# Altium PCB LS1C300B_176A_Msystem.PcbDoc (part 3 of 3)
Units mm, origin at the board's own origin, x right, y up, seen from the top; angles counter-clockwise.
Board outline 100.25 x 70.25 mm, 2 copper layers (Top Layer, Bottom Layer); 139 components, 183 nets, 683 pads, 164 vias.
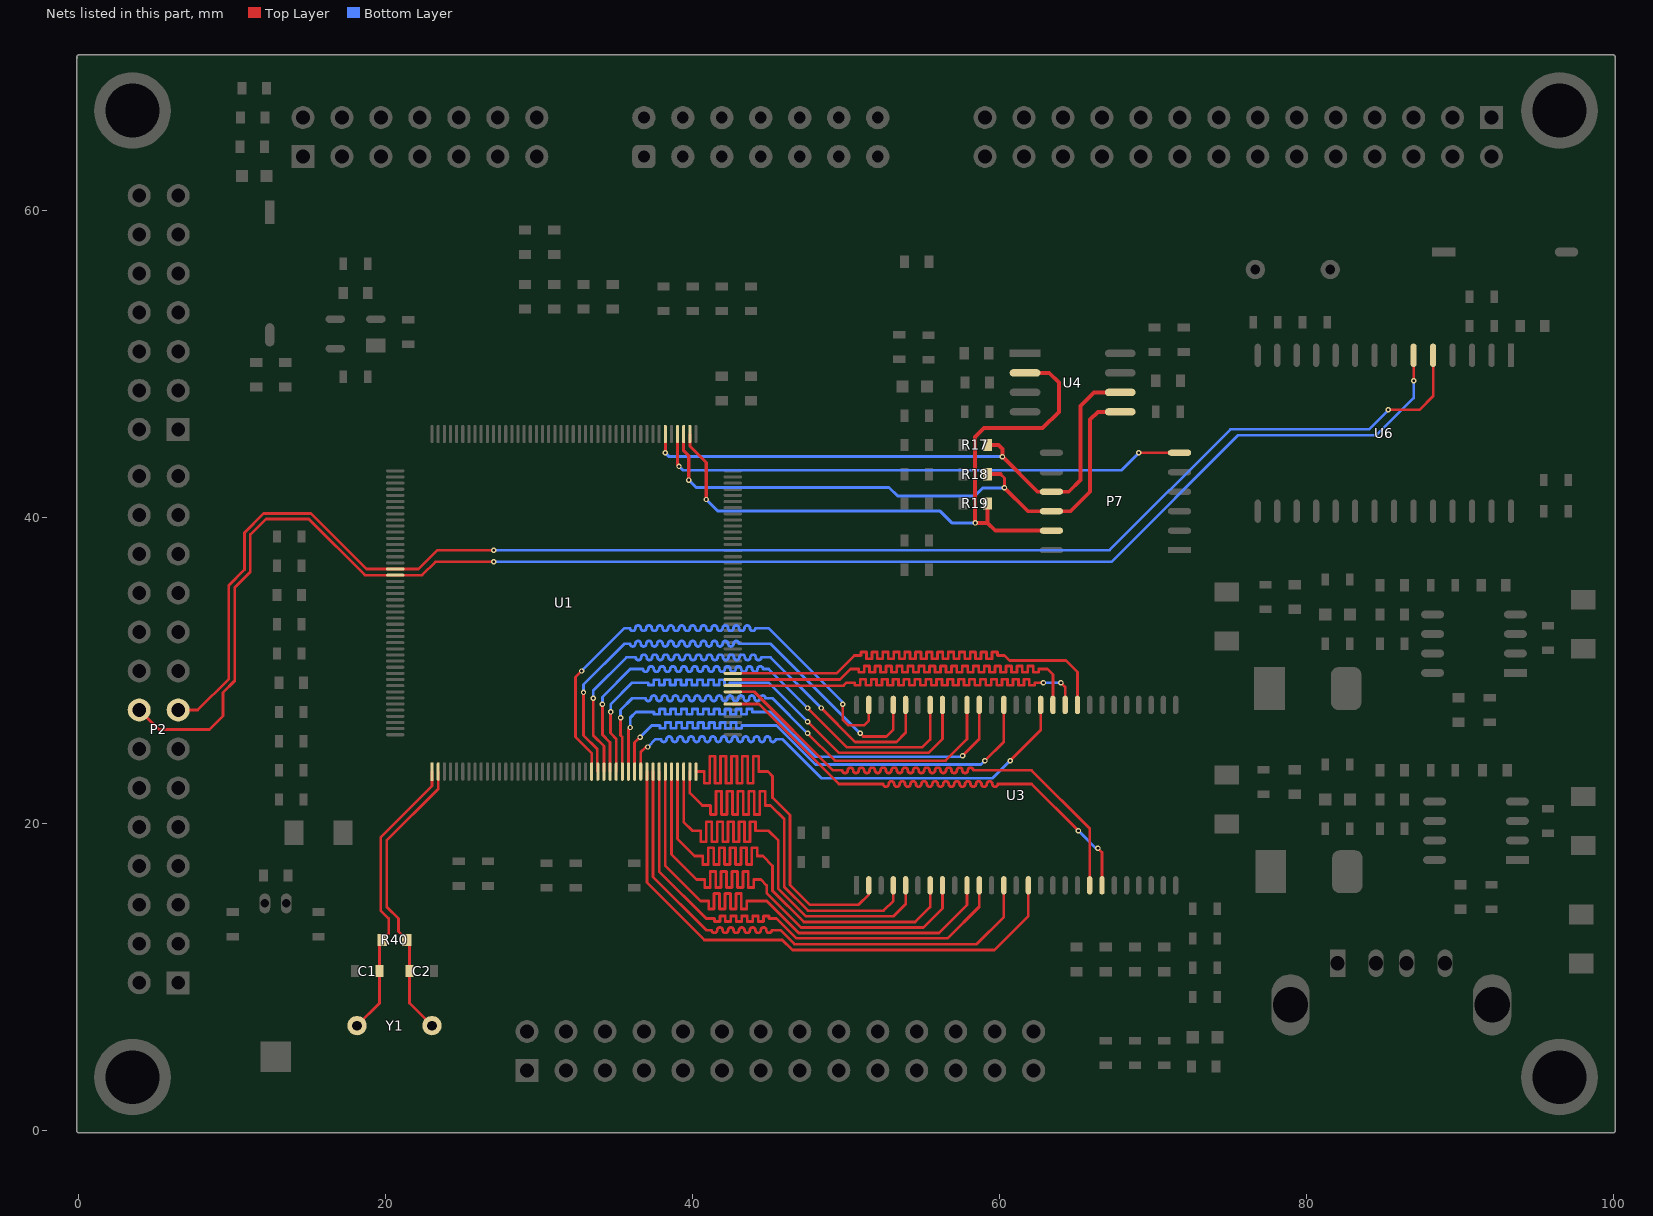
[diagram p3: the nets of this part, all layers, seen from the top]

## Via types
v1: diameter 0.356, hole 0.178, Top Layer to Bottom Layer, 153 vias
v2: diameter 0.508, hole 0.254, Top Layer to Bottom Layer, 4 vias
v3: diameter 1.5, hole 0.75, Top Layer to Bottom Layer, 3 vias
v4: diameter 0.762, hole 0.381, Top Layer to Bottom Layer, 2 vias
v5: diameter 0.6, hole 0.3, Top Layer to Bottom Layer, 1 vias
v6: diameter 0.8, hole 0.4, Top Layer to Bottom Layer, 1 vias

## Nets (pads, with @x,y where several pads share a name; then routed paths per layer and width w, separated by ;. In a path a pad name is that pad's centre, name@x,y a point inside that pad or via, vN(x,y) a via of type N, cw(c..) or ccw(c..) an arc to the next point about the centre after c; other vN are vias at no path point) (continued)
SDRAM_A12: U1.55 U3.36 | length 36.8
  Top Layer w0.178: U1.55@42.623,29.817 49.375,29.817 50.546,30.988 50.8,30.988 50.978,30.988 50.978,31.214 51.333,31.214 51.333,30.988 51.333,30.762 51.689,30.762 51.689,30.988 51.689,31.214 52.045,31.214 52.045,30.988 52.045,30.762 52.4,30.762 52.4,30.988 52.4,31.214 52.756,31.214 52.756,30.988 52.756,30.762 53.111,30.762 53.111,30.988 53.111,31.214 53.467,31.214 53.467,30.988 53.467,30.762 53.823,30.762 53.823,30.988 53.823,31.214 54.178,31.214 54.178,30.988 54.178,30.762 54.534,30.762 54.534,30.988 54.534,31.214 54.889,31.214 54.889,30.988 54.889,30.762 55.245,30.762 55.245,30.988 55.245,31.214 55.601,31.214 55.601,30.988 55.601,30.762 55.956,30.762 55.956,30.988 55.956,31.214 56.312,31.214 56.312,30.988 56.312,30.762 56.667,30.762 56.667,30.988 56.667,31.214 57.023,31.214 57.023,30.988 57.023,30.762 57.379,30.762 57.379,30.988 57.379,31.214 57.734,31.214 57.734,30.988 57.734,30.762 58.09,30.762 58.09,30.988 58.09,31.214 58.445,31.214 58.445,30.988 58.445,30.762 58.801,30.762 58.801,30.988 58.801,31.214 59.157,31.214 59.157,30.988 59.157,30.762 59.512,30.762 59.512,30.988 59.512,31.214 59.868,31.214 59.868,30.988 60.325,30.988 60.655,30.658 64.338,30.658 65.086,29.91 U3.36@65.086,27.762
SDRAM_BA0: U1.52 U3.20 | length 35.5
  Top Layer w0.178: U1.52@42.623,28.617 44.022,28.617 49.144,23.495 49.403,23.495 49.759,23.495 ccw(c49.936,23.495) 50.114,23.495 cw(c50.292,23.495) 50.47,23.495 ccw(c50.648,23.495) 50.825,23.495 cw(c51.003,23.495) 51.181,23.495 ccw(c51.359,23.495) 51.537,23.495 cw(c51.714,23.495) 51.892,23.495 ccw(c52.07,23.495) 52.248,23.495 cw(c52.426,23.495) 52.603,23.495 ccw(c52.781,23.495) 52.959,23.495 cw(c53.137,23.495) 53.315,23.495 ccw(c53.492,23.495) 53.67,23.495 cw(c53.848,23.495) 54.026,23.495 ccw(c54.204,23.495) 54.381,23.495 cw(c54.559,23.495) 54.737,23.495 ccw(c54.915,23.495) 55.093,23.495 cw(c55.27,23.495) 55.448,23.495 ccw(c55.626,23.495) 55.804,23.495 cw(c55.982,23.495) 56.159,23.495 ccw(c56.337,23.495) 56.515,23.495 cw(c56.693,23.495) 56.871,23.495 ccw(c57.048,23.495) 57.226,23.495 cw(c57.404,23.495) 57.582,23.495 ccw(c57.76,23.495) 57.937,23.495 cw(c58.115,23.495) 58.293,23.495 58.42,23.495 62.103,23.495 65.886,19.712 U3.20@65.886,16.002
SDRAM_BA1: U1.50 U3.21 | length 34.5
  Top Layer w0.178: U1.50@42.623,27.817 44.319,27.817 49.53,22.606 52.07,22.606 52.426,22.606 ccw(c52.603,22.606) 52.781,22.606 cw(c52.959,22.606) 53.137,22.606 ccw(c53.315,22.606) 53.492,22.606 cw(c53.67,22.606) 53.848,22.606 ccw(c54.026,22.606) 54.204,22.606 cw(c54.381,22.606) 54.559,22.606 ccw(c54.737,22.606) 54.915,22.606 cw(c55.093,22.606) 55.27,22.606 ccw(c55.448,22.606) 55.626,22.606 cw(c55.804,22.606) 55.982,22.606 ccw(c56.159,22.606) 56.337,22.606 cw(c56.515,22.606) 56.693,22.606 ccw(c56.871,22.606) 57.048,22.606 cw(c57.226,22.606) 57.404,22.606 ccw(c57.582,22.606) 57.76,22.606 cw(c57.937,22.606) 58.115,22.606 ccw(c58.293,22.606) 58.471,22.606 cw(c58.649,22.606) 58.826,22.606 ccw(c59.004,22.606) 59.182,22.606 cw(c59.36,22.606) 59.538,22.606 ccw(c59.715,22.606) 59.893,22.606 60.249,22.606 60.325,22.606 62.103,22.606 v1(65.151,19.558) ; v1(66.421,18.415) 66.686,18.15 U3.21@66.686,16.002
  Bottom Layer w0.178: v1(65.151,19.558) 66.294,18.415 v1(66.421,18.415)
SDRAM_CKE: U1.53 U3.37 | length 36
  Top Layer w0.178: U1.53@42.623,29.017 49.845,29.017 50.038,29.21 50.216,29.21 50.571,29.21 50.571,29.045 50.927,29.045 50.927,29.21 50.927,29.439 51.283,29.439 51.283,29.21 51.283,29.045 51.638,29.045 51.638,29.21 51.638,29.439 51.994,29.439 51.994,29.21 51.994,29.045 52.349,29.045 52.349,29.21 52.349,29.439 52.705,29.439 52.705,29.21 52.705,29.045 53.061,29.045 53.061,29.21 53.061,29.439 53.416,29.439 53.416,29.21 53.416,29.045 53.772,29.045 53.772,29.21 53.772,29.439 54.127,29.439 54.127,29.21 54.127,29.045 54.483,29.045 54.483,29.21 54.483,29.439 54.839,29.439 54.839,29.21 54.839,29.045 55.194,29.045 55.194,29.21 55.194,29.439 55.55,29.439 55.55,29.21 55.55,29.045 55.905,29.045 55.905,29.21 55.905,29.439 56.261,29.439 56.261,29.21 56.261,29.045 56.617,29.045 56.617,29.21 56.617,29.439 56.972,29.439 56.972,29.21 56.972,29.045 57.328,29.045 57.328,29.21 57.328,29.439 57.683,29.439 57.683,29.21 57.683,29.045 58.039,29.045 58.039,29.21 58.039,29.439 58.395,29.439 58.395,29.21 58.395,29.045 58.75,29.045 58.75,29.21 58.75,29.439 59.106,29.439 59.106,29.21 59.106,29.045 59.461,29.045 59.461,29.21 59.461,29.439 59.817,29.439 59.817,29.21 59.817,29.045 60.173,29.045 60.173,29.21 60.173,29.439 60.528,29.439 60.528,29.21 60.528,29.045 60.884,29.045 60.884,29.21 60.884,29.439 61.239,29.439 61.239,29.21 61.239,29.045 61.595,29.045 61.595,29.21 61.595,29.439 61.951,29.439 61.951,29.21 61.951,29.045 62.306,29.045 62.306,29.21 62.611,29.21 v1(62.865,29.21) ; v1(64.008,29.21) 64.286,28.932 U3.37@64.286,27.762
  Bottom Layer w0.178: v1(62.865,29.21) v1(64.008,29.21)
SDRAM_CLK: U1.54 U3.38 | length 36.7
  Top Layer w0.178: U1.54@42.623,29.417 49.61,29.417 50.292,30.099 50.47,30.099 50.825,30.099 50.825,29.896 51.181,29.896 51.181,30.099 51.181,30.302 51.537,30.302 51.537,30.099 51.537,29.896 51.892,29.896 51.892,30.099 51.892,30.302 52.248,30.302 52.248,30.099 52.248,29.896 52.603,29.896 52.603,30.099 52.603,30.302 52.959,30.302 52.959,30.099 52.959,29.896 53.315,29.896 53.315,30.099 53.315,30.302 53.67,30.302 53.67,30.099 53.67,29.896 54.026,29.896 54.026,30.099 54.026,30.302 54.381,30.302 54.381,30.099 54.381,29.896 54.737,29.896 54.737,30.099 54.737,30.302 55.093,30.302 55.093,30.099 55.093,29.896 55.448,29.896 55.448,30.099 55.448,30.302 55.804,30.302 55.804,30.099 55.804,29.896 56.159,29.896 56.159,30.099 56.159,30.302 56.515,30.302 56.515,30.099 56.515,29.896 56.871,29.896 56.871,30.099 56.871,30.302 57.226,30.302 57.226,30.099 57.226,29.896 57.582,29.896 57.582,30.099 57.582,30.302 57.937,30.302 57.937,30.099 57.937,29.896 58.293,29.896 58.293,30.099 58.293,30.302 58.649,30.302 58.649,30.099 58.649,29.896 59.004,29.896 59.004,30.099 59.004,30.302 59.36,30.302 59.36,30.099 59.36,29.896 59.715,29.896 59.715,30.099 59.715,30.302 60.071,30.302 60.071,30.099 60.071,29.896 60.427,29.896 60.427,30.099 60.427,30.302 60.782,30.302 60.782,30.099 60.782,29.896 61.138,29.896 61.138,30.099 61.138,30.302 61.493,30.302 61.493,30.099 61.493,29.896 61.849,29.896 61.849,30.099 61.849,30.302 62.205,30.302 62.205,30.099 62.205,29.896 62.56,29.896 62.56,30.099 62.738,30.099 63.119,30.099 63.486,29.732 U3.38@63.486,27.762
SDRAM_D0: U1.44 U3.2 | length 36.8
  Top Layer w0.178: U1.44@40.223,23.417 40.401,23.417 40.756,23.417 40.756,22.658 41.112,22.658 41.112,23.417 41.112,24.42 41.468,24.42 41.468,23.417 41.468,22.658 41.823,22.658 41.823,23.417 41.823,24.42 42.179,24.42 42.179,23.417 42.179,22.658 42.534,22.658 42.534,23.417 42.534,24.42 42.89,24.42 42.89,23.417 42.89,22.658 43.246,22.658 43.246,23.417 43.246,24.42 43.601,24.42 43.601,23.417 43.601,22.658 43.957,22.658 43.957,23.417 43.957,24.42 44.312,24.42 44.312,23.417 44.668,23.417 44.909,23.417 45.212,23.114 45.212,21.717 46.355,20.574 46.355,16.017 47.64,14.732 50.8,14.732 51.486,15.418 U3.2@51.486,16.002
SDRAM_D1: U1.43 U3.4 | length 36.8
  Top Layer w0.178: U1.43@39.823,23.417 39.823,22.026 40.64,21.209 40.818,21.209 41.173,21.209 41.173,20.614 41.529,20.614 41.529,21.209 41.529,22.127 41.885,22.127 41.885,21.209 41.885,20.614 42.24,20.614 42.24,21.209 42.24,22.127 42.596,22.127 42.596,21.209 42.596,20.614 42.951,20.614 42.951,21.209 42.951,22.127 43.307,22.127 43.307,21.209 43.307,20.614 43.663,20.614 43.663,21.209 43.663,22.127 44.018,22.127 44.018,21.209 44.018,20.614 44.374,20.614 44.374,21.209 44.374,22.127 44.729,22.127 44.729,21.209 45.085,21.209 45.974,20.32 45.974,15.895 47.518,14.351 52.451,14.351 53.086,14.986 U3.4@53.086,16.002
SDRAM_D2: U1.42 U3.5 | length 36.8
  Top Layer w0.178: U1.42@39.423,23.417 39.423,20.14 40.005,19.558 40.183,19.558 40.538,19.558 40.538,18.837 40.894,18.837 40.894,19.558 40.894,20.152 41.25,20.152 41.25,19.558 41.25,18.837 41.605,18.837 41.605,19.558 41.605,20.152 41.961,20.152 41.961,19.558 41.961,18.837 42.316,18.837 42.316,19.558 42.316,20.152 42.672,20.152 42.672,19.558 42.672,18.837 43.028,18.837 43.028,19.558 43.028,20.152 43.383,20.152 43.383,19.558 43.383,18.837 43.739,18.837 43.739,19.558 43.739,20.152 44.094,20.152 44.094,19.558 44.577,19.558 44.958,19.558 45.593,18.923 45.593,15.773 47.371,13.995 53.111,13.995 53.886,14.77 U3.5@53.886,16.002
SDRAM_D3: U1.41 U3.7 | length 36.8
  Top Layer w0.178: U1.41@39.023,23.417 39.023,19.016 40.132,17.907 40.31,17.907 40.665,17.907 40.665,17.361 41.021,17.361 41.021,17.907 41.021,18.453 41.377,18.453 41.377,17.907 41.377,17.361 41.732,17.361 41.732,17.907 41.732,18.453 42.088,18.453 42.088,17.907 42.088,17.361 42.443,17.361 42.443,17.907 42.443,18.453 42.799,18.453 42.799,17.907 42.799,17.361 43.155,17.361 43.155,17.907 43.155,18.453 43.51,18.453 43.51,17.907 43.51,17.361 43.866,17.361 43.866,17.907 43.866,18.453 44.221,18.453 44.221,17.907 44.45,17.907 44.577,17.907 45.212,17.272 45.212,15.652 47.249,13.614 54.508,13.614 55.486,14.592 U3.7@55.486,16.002
SDRAM_D4: U1.40 U3.8 | length 36.8
  Top Layer w0.178: U1.40@38.623,23.417 38.623,18.019 40.259,16.383 40.437,16.383 40.792,16.383 40.792,15.855 41.148,15.855 41.148,16.383 41.148,16.899 41.504,16.899 41.504,16.383 41.504,15.855 41.859,15.855 41.859,16.383 41.859,16.899 42.215,16.899 42.215,16.383 42.215,15.855 42.57,15.855 42.57,16.383 42.57,16.899 42.926,16.899 42.926,16.383 42.926,15.855 43.282,15.855 43.282,16.383 43.282,16.899 43.637,16.899 43.637,16.383 43.637,15.855 43.993,15.855 43.993,16.383 44.196,16.383 44.45,16.383 44.831,16.002 44.831,15.494 47.066,13.259 55.042,13.259 56.286,14.503 U3.8@56.286,16.002
SDRAM_D5: U1.39 U3.10 | length 36.7
  Top Layer w0.178: U1.39@38.223,23.417 38.223,17.276 40.513,14.986 40.691,14.986 41.046,14.986 41.046,14.466 41.402,14.466 41.402,14.986 41.402,15.464 41.758,15.464 41.758,14.986 41.758,14.466 42.113,14.466 42.113,14.986 42.113,15.464 42.469,15.464 42.469,14.986 42.469,14.466 42.824,14.466 42.824,14.986 42.824,15.464 43.18,15.464 43.18,14.986 43.18,14.466 43.536,14.466 43.536,14.986 43.688,14.986 44.836,14.986 46.919,12.903 56.057,12.903 57.886,14.732 U3.10@57.886,16.002
SDRAM_D6: U1.38 U3.11 | length 35.1
  Top Layer w0.178: U1.38@37.823,23.417 37.823,16.914 40.894,13.843 41.072,13.843 41.427,13.843 41.427,13.64 41.783,13.64 41.783,13.843 41.783,14.008 42.139,14.008 42.139,13.843 42.139,13.64 42.494,13.64 42.494,13.843 42.494,14.008 42.85,14.008 42.85,13.843 42.85,13.64 43.205,13.64 43.205,13.843 43.205,14.008 43.561,14.008 43.561,13.843 43.561,13.64 43.917,13.64 43.917,13.843 43.917,14.008 44.272,14.008 44.272,13.843 44.272,13.64 44.628,13.64 44.628,13.843 44.628,14.008 44.983,14.008 44.983,13.843 45.339,13.843 45.466,13.843 46.761,12.548 56.629,12.548 58.686,14.605 U3.11@58.686,16.002
SDRAM_D7: U1.37 U3.13 | length 36.6
  Top Layer w0.178: U1.37@37.423,23.417 37.423,16.552 40.894,13.081 41.25,13.081 ccw(c41.427,13.081) 41.605,13.081 cw(c41.783,13.081) 41.961,13.081 ccw(c42.139,13.081) 42.316,13.081 cw(c42.494,13.081) 42.672,13.081 ccw(c42.85,13.081) 43.028,13.081 cw(c43.205,13.081) 43.383,13.081 ccw(c43.561,13.081) 43.739,13.081 cw(c43.917,13.081) 44.094,13.081 ccw(c44.272,13.081) 44.45,13.081 cw(c44.628,13.081) 44.806,13.081 ccw(c44.983,13.081) 45.161,13.081 45.466,13.081 45.725,13.081 46.64,12.167 58.522,12.167 60.286,13.931 U3.13@60.286,16.002
SDRAM_D8: U1.34 U3.42 | length 36.1
  Top Layer w0.178: U1.34@36.223,23.417 36.223,25.301 v1(36.576,25.654) ; v1(59.055,24.13) 60.286,25.361 U3.42@60.286,27.762
  Bottom Layer w0.178: v1(36.576,25.654) 37.338,26.416 37.516,26.416 37.871,26.416 37.871,26.239 38.227,26.239 38.227,26.416 38.227,26.617 38.583,26.617 38.583,26.416 38.583,26.239 38.938,26.239 38.938,26.416 38.938,26.617 39.294,26.617 39.294,26.416 39.294,26.239 39.649,26.239 39.649,26.416 39.649,26.617 40.005,26.617 40.005,26.416 40.005,26.239 40.361,26.239 40.361,26.416 40.361,26.617 40.716,26.617 40.716,26.416 40.716,26.239 41.072,26.239 41.072,26.416 41.072,26.617 41.427,26.617 41.427,26.416 41.427,26.239 41.783,26.239 41.783,26.416 41.783,26.617 42.139,26.617 42.139,26.416 42.139,26.239 42.494,26.239 42.494,26.416 42.494,26.617 42.85,26.617 42.85,26.416 42.85,26.239 43.205,26.239 43.205,26.416 43.358,26.416 45.466,26.416 48.006,23.876 58.801,23.876 v1(59.055,24.13)
SDRAM_D9: U1.33 U3.44 | length 36.5
  Top Layer w0.178: U1.33@35.823,23.417 35.823,26.171 v1(35.941,26.289) ; v1(57.594,24.447) 58.686,25.539 U3.44@58.686,27.762
  Bottom Layer w0.178: v1(35.941,26.289) 35.941,26.924 36.322,27.305 36.957,27.305 37.135,27.305 37.49,27.305 37.49,27.154 37.846,27.154 37.846,27.305 37.846,27.494 38.202,27.494 38.202,27.305 38.202,27.154 38.557,27.154 38.557,27.305 38.557,27.494 38.913,27.494 38.913,27.305 38.913,27.154 39.268,27.154 39.268,27.305 39.268,27.494 39.624,27.494 39.624,27.305 39.624,27.154 39.98,27.154 39.98,27.305 39.98,27.494 40.335,27.494 40.335,27.305 40.335,27.154 40.691,27.154 40.691,27.305 40.691,27.494 41.046,27.494 41.046,27.305 41.046,27.154 41.402,27.154 41.402,27.305 41.402,27.494 41.758,27.494 41.758,27.305 41.758,27.154 42.113,27.154 42.113,27.305 42.113,27.494 42.469,27.494 42.469,27.305 42.469,27.154 42.824,27.154 42.824,27.305 42.824,27.494 43.18,27.494 43.18,27.305 43.18,27.154 43.536,27.154 43.536,27.305 43.536,27.494 43.891,27.494 43.891,27.305 44.107,27.305 45.085,27.305 48.006,24.384 57.531,24.384 v1(57.594,24.447)
SDRAM_D10: U1.32 U3.45 | length 35.9
  Top Layer w0.178: v1(35.306,26.924) 35.306,25.781 35.423,25.664 U1.32@35.423,23.417 ; v1(47.498,25.908) 49.276,24.13 56.489,24.13 57.886,25.527 U3.45@57.886,27.762
  Bottom Layer w0.178: v1(35.306,26.924) 35.306,27.432 36.068,28.194 36.576,28.194 36.932,28.194 ccw(c37.109,28.194) 37.287,28.194 cw(c37.465,28.194) 37.643,28.194 ccw(c37.821,28.194) 37.998,28.194 cw(c38.176,28.194) 38.354,28.194 ccw(c38.532,28.194) 38.71,28.194 cw(c38.887,28.194) 39.065,28.194 ccw(c39.243,28.194) 39.421,28.194 cw(c39.599,28.194) 39.776,28.194 ccw(c39.954,28.194) 40.132,28.194 cw(c40.31,28.194) 40.488,28.194 ccw(c40.665,28.194) 40.843,28.194 cw(c41.021,28.194) 41.199,28.194 ccw(c41.377,28.194) 41.554,28.194 cw(c41.732,28.194) 41.91,28.194 ccw(c42.088,28.194) 42.266,28.194 cw(c42.443,28.194) 42.621,28.194 ccw(c42.799,28.194) 42.977,28.194 cw(c43.155,28.194) 43.332,28.194 ccw(c43.51,28.194) 43.688,28.194 cw(c43.866,28.194) 44.044,28.194 ccw(c44.221,28.194) 44.399,28.194 cw(c44.577,28.194) 44.755,28.194 44.958,28.194 45.212,28.194 v1(47.498,25.908)
SDRAM_D11: U1.31 U3.47 | length 36.4
  Top Layer w0.178: v1(34.671,27.305) 34.646,27.28 34.646,25.933 35.023,25.556 U1.31@35.023,23.417 ; v1(47.498,26.67) 49.53,24.638 55.372,24.638 56.286,25.552 U3.47@56.286,27.762
  Bottom Layer w0.178: v1(34.671,27.305) 34.671,27.813 36.068,29.21 36.576,29.21 36.754,29.21 37.109,29.21 37.109,29.055 37.465,29.055 37.465,29.21 37.465,29.403 37.821,29.403 37.821,29.21 37.821,29.055 38.176,29.055 38.176,29.21 38.176,29.403 38.532,29.403 38.532,29.21 38.532,29.055 38.887,29.055 38.887,29.21 38.887,29.403 39.243,29.403 39.243,29.21 39.243,29.055 39.599,29.055 39.599,29.21 39.599,29.403 39.954,29.403 39.954,29.21 39.954,29.055 40.31,29.055 40.31,29.21 40.31,29.403 40.665,29.403 40.665,29.21 40.665,29.055 41.021,29.055 41.021,29.21 41.021,29.403 41.377,29.403 41.377,29.21 41.377,29.055 41.732,29.055 41.732,29.21 41.732,29.403 42.088,29.403 42.088,29.21 42.088,29.055 42.443,29.055 42.443,29.21 42.672,29.21 44.958,29.21 v1(47.498,26.67)
SDRAM_D12: U1.30 U3.48 | length 36.2
  Top Layer w0.178: v1(34.125,27.813) 34.125,25.819 34.623,25.321 U1.30@34.623,23.417 ; v1(47.498,27.559) 50.063,24.994 54.966,24.994 55.486,25.514 U3.48@55.486,27.762
  Bottom Layer w0.178: v1(34.125,27.813) 34.125,28.283 35.941,30.099 36.411,30.099 36.767,30.099 ccw(c36.944,30.099) 37.122,30.099 cw(c37.3,30.099) 37.478,30.099 ccw(c37.655,30.099) 37.833,30.099 cw(c38.011,30.099) 38.189,30.099 ccw(c38.367,30.099) 38.544,30.099 cw(c38.722,30.099) 38.9,30.099 ccw(c39.078,30.099) 39.256,30.099 cw(c39.433,30.099) 39.611,30.099 ccw(c39.789,30.099) 39.967,30.099 cw(c40.145,30.099) 40.322,30.099 ccw(c40.5,30.099) 40.678,30.099 cw(c40.856,30.099) 41.034,30.099 ccw(c41.212,30.099) 41.389,30.099 cw(c41.567,30.099) 41.745,30.099 ccw(c41.923,30.099) 42.1,30.099 cw(c42.278,30.099) 42.456,30.099 ccw(c42.634,30.099) 42.812,30.099 cw(c42.989,30.099) 43.167,30.099 ccw(c43.345,30.099) 43.523,30.099 cw(c43.701,30.099) 43.878,30.099 ccw(c44.056,30.099) 44.234,30.099 cw(c44.412,30.099) 44.59,30.099 44.831,30.099 44.958,30.099 v1(47.498,27.559)
SDRAM_D13: U1.29 U3.50 | length 35.8
  Top Layer w0.178: v1(33.528,28.194) 33.528,25.781 34.223,25.086 U1.29@34.223,23.417 ; v1(48.387,27.559) 50.597,25.349 53.289,25.349 53.886,25.946 U3.50@53.886,27.762
  Bottom Layer w0.178: v1(33.528,28.194) 33.528,28.702 35.687,30.861 35.941,30.861 36.297,30.861 ccw(c36.474,30.861) 36.652,30.861 cw(c36.83,30.861) 37.008,30.861 ccw(c37.186,30.861) 37.363,30.861 cw(c37.541,30.861) 37.719,30.861 ccw(c37.897,30.861) 38.075,30.861 cw(c38.252,30.861) 38.43,30.861 ccw(c38.608,30.861) 38.786,30.861 cw(c38.964,30.861) 39.141,30.861 ccw(c39.319,30.861) 39.497,30.861 cw(c39.675,30.861) 39.853,30.861 ccw(c40.03,30.861) 40.208,30.861 cw(c40.386,30.861) 40.564,30.861 ccw(c40.742,30.861) 40.919,30.861 cw(c41.097,30.861) 41.275,30.861 ccw(c41.453,30.861) 41.631,30.861 cw(c41.808,30.861) 41.986,30.861 ccw(c42.164,30.861) 42.342,30.861 cw(c42.52,30.861) 42.697,30.861 ccw(c42.875,30.861) 43.053,30.861 cw(c43.231,30.861) 43.409,30.861 ccw(c43.586,30.861) 43.764,30.861 cw(c43.942,30.861) 44.12,30.861 ccw(c44.298,30.861) 44.475,30.861 44.831,30.861 44.958,30.861 45.085,30.861 v1(48.387,27.559)
SDRAM_D14: U1.28 U3.51 | length 35.7
  Top Layer w0.178: v1(32.893,28.575) 32.893,25.781 33.79,24.884 33.79,23.45 U1.28@33.823,23.417 ; v1(50.927,25.908) 51.13,25.705 52.629,25.705 53.086,26.162 U3.51@53.086,27.762
  Bottom Layer w0.178: v1(32.893,28.575) 32.893,29.083 35.56,31.75 35.916,31.75 ccw(c36.093,31.75) 36.271,31.75 cw(c36.449,31.75) 36.627,31.75 ccw(c36.805,31.75) 36.982,31.75 cw(c37.16,31.75) 37.338,31.75 ccw(c37.516,31.75) 37.694,31.75 cw(c37.871,31.75) 38.049,31.75 ccw(c38.227,31.75) 38.405,31.75 cw(c38.583,31.75) 38.76,31.75 ccw(c38.938,31.75) 39.116,31.75 cw(c39.294,31.75) 39.472,31.75 ccw(c39.649,31.75) 39.827,31.75 cw(c40.005,31.75) 40.183,31.75 ccw(c40.361,31.75) 40.538,31.75 cw(c40.716,31.75) 40.894,31.75 ccw(c41.072,31.75) 41.25,31.75 cw(c41.427,31.75) 41.605,31.75 ccw(c41.783,31.75) 41.961,31.75 cw(c42.139,31.75) 42.316,31.75 ccw(c42.494,31.75) 42.672,31.75 cw(c42.85,31.75) 43.028,31.75 43.383,31.75 43.434,31.75 45.085,31.75 v1(50.927,25.908)
SDRAM_D15: U1.27 U3.53 | length 36.1
  Top Layer w0.178: v1(32.766,29.972) 32.372,29.578 32.372,25.667 33.423,24.616 U1.27@33.423,23.417 ; v1(49.784,27.813) 49.784,26.797 50.152,26.429 51.168,26.429 51.486,26.747 U3.53@51.486,27.762
  Bottom Layer w0.178: v1(32.766,29.972) 35.56,32.766 35.916,32.766 ccw(c36.093,32.766) 36.271,32.766 cw(c36.449,32.766) 36.627,32.766 ccw(c36.805,32.766) 36.982,32.766 cw(c37.16,32.766) 37.338,32.766 ccw(c37.516,32.766) 37.694,32.766 cw(c37.871,32.766) 38.049,32.766 ccw(c38.227,32.766) 38.405,32.766 cw(c38.583,32.766) 38.76,32.766 ccw(c38.938,32.766) 39.116,32.766 cw(c39.294,32.766) 39.472,32.766 ccw(c39.649,32.766) 39.827,32.766 cw(c40.005,32.766) 40.183,32.766 ccw(c40.361,32.766) 40.538,32.766 cw(c40.716,32.766) 40.894,32.766 ccw(c41.072,32.766) 41.25,32.766 cw(c41.427,32.766) 41.605,32.766 ccw(c41.783,32.766) 41.961,32.766 cw(c42.139,32.766) 42.316,32.766 ccw(c42.494,32.766) 42.672,32.766 cw(c42.85,32.766) 43.028,32.766 ccw(c43.205,32.766) 43.383,32.766 cw(c43.561,32.766) 43.739,32.766 ccw(c43.917,32.766) 44.094,32.766 44.196,32.766 44.958,32.766 49.784,27.94 v1(49.784,27.813)
SDRAM_DQM0: U1.36 U3.15 | length 36.8
  Top Layer w0.178: U1.36@37.023,23.417 37.023,16.19 40.767,12.446 45.847,12.446 46.507,11.786 59.665,11.786 61.886,14.007 U3.15@61.886,16.002
SDRAM_DQM1: U1.35 U3.39 | length 35.9
  Top Layer w0.178: U1.35@36.623,23.417 36.623,24.685 36.957,25.019 v1(37.084,25.019) ; v1(60.706,24.13) 62.686,26.11 U3.39@62.686,27.762
  Bottom Layer w0.178: v1(37.084,25.019) 37.592,25.527 37.948,25.527 ccw(c38.125,25.527) 38.303,25.527 cw(c38.481,25.527) 38.659,25.527 ccw(c38.837,25.527) 39.014,25.527 cw(c39.192,25.527) 39.37,25.527 ccw(c39.548,25.527) 39.726,25.527 cw(c39.903,25.527) 40.081,25.527 ccw(c40.259,25.527) 40.437,25.527 cw(c40.615,25.527) 40.792,25.527 ccw(c40.97,25.527) 41.148,25.527 cw(c41.326,25.527) 41.504,25.527 ccw(c41.681,25.527) 41.859,25.527 cw(c42.037,25.527) 42.215,25.527 ccw(c42.393,25.527) 42.57,25.527 cw(c42.748,25.527) 42.926,25.527 ccw(c43.104,25.527) 43.282,25.527 cw(c43.459,25.527) 43.637,25.527 ccw(c43.815,25.527) 43.993,25.527 cw(c44.171,25.527) 44.348,25.527 ccw(c44.526,25.527) 44.704,25.527 cw(c44.882,25.527) 45.06,25.527 ccw(c45.237,25.527) 45.415,25.527 45.771,25.527 45.847,25.527 48.387,22.987 59.563,22.987 v1(60.706,24.13)
SPI0_CLK: P7.9 R17.1 U1.94 U4.6 | length 39
  Top Layer w0.2: U1.94@38.223,45.417 38.227,45.413 v1(38.227,44.196)
  Top Layer w0.254: R17.1@59.22,44.704 59.944,44.704 60.198,44.45 v1(60.198,43.942) 62.484,41.656 P7.9@63.389,41.656 64.516,41.656 65.278,42.418 65.278,47.244 66.167,48.133 U4.6@67.87,48.133
  Bottom Layer w0.2: v1(38.227,44.196) 38.481,43.942 v1(60.198,43.942)
SPI0_CS0: P7.6 U1.92 | length 35.4
  Top Layer w0.178: U1.92@39.023,45.417 39.023,43.4 v1(39.116,43.307) ; v1(69.088,44.196) P7.6@71.739,44.196
  Bottom Layer w0.178: v1(39.116,43.307) 39.37,43.053 67.945,43.053 v1(69.088,44.196)
SPI0_MISO: P7.11 R19.1 U1.90 U4.2 | length 45.4
  Top Layer w0.2: U1.90@39.823,45.417 39.823,44.632 40.894,43.561 v1(40.894,41.148)
  Top Layer w0.254: R19.1@59.22,40.894 59.22,39.624 ; U4.2@61.67,49.403 63.246,49.403 63.881,48.768 63.881,46.863 62.814,45.796 59.004,45.796 58.42,45.212 v1(58.42,39.624) 59.22,39.624 ; P7.11@63.389,39.116 59.728,39.116 59.22,39.624
  Bottom Layer w0.2: v1(40.894,41.148) 41.656,40.386 56.134,40.386 56.896,39.624 v1(58.42,39.624)
SPI0_MOSI: P7.10 R18.1 U1.91 U4.5 | length 39.8
  Top Layer w0.2: U1.91@39.423,45.417 39.423,44.323 39.751,43.995 v1(39.751,42.418) ; 60.071,42.799 60.325,42.545 v1(60.325,41.91)
  Top Layer w0.254: R18.1@59.22,42.799 60.071,42.799 ; v1(60.325,41.91) 61.849,40.386 P7.10@63.389,40.386 64.643,40.386 65.913,41.656 65.913,46.355 66.421,46.863 U4.5@67.87,46.863
  Bottom Layer w0.2: v1(39.751,42.418) 40.235,41.934 52.808,41.934 53.364,41.378 58.396,41.378 58.928,41.91 v1(60.325,41.91)
UART2_RX: P2.15 U1.149 U6.5 | length 100.9
  Top Layer w0.178: P2.15@6.477,27.432 7.747,27.432 9.779,29.464 9.779,35.56 10.795,36.576 10.795,38.984 12.045,40.234 15.133,40.234 18.75,36.617 U1.149@20.623,36.617 22.139,36.617 23.368,37.846 v1(27.051,37.846) ; v1(85.344,46.99) 87.376,46.99 88.265,47.879 U6.5@88.265,50.546
  Bottom Layer w0.178: v1(27.051,37.846) 67.183,37.846 75.057,45.72 84.074,45.72 v1(85.344,46.99)
UART2_TX: P2.16 U1.150 U6.6 | length 104.2
  Top Layer w0.178: P2.16@3.937,27.432 5.207,26.162 8.509,26.162 9.398,27.051 9.398,28.575 10.16,29.337 10.16,35.423 11.176,36.439 11.176,38.862 12.192,39.878 14.986,39.878 18.647,36.217 U1.150@20.623,36.217 22.374,36.217 23.241,37.084 v1(27.051,37.084) ; v1(86.995,48.895) U6.6@86.995,50.546
  Bottom Layer w0.178: v1(27.051,37.084) 67.31,37.084 75.565,45.339 84.582,45.339 86.995,47.752 v1(86.995,48.895)
XTALI: C1.2 R40.2 U1.1 Y1.1 | length 19
  Top Layer w0.178: Y1.1@18.134,6.858 19.596,8.32 C1.2@19.596,10.414 19.596,12.268 R40.2@19.774,12.446 20.193,12.865 20.193,13.843 19.674,14.362 19.674,19.133 23.023,22.482 U1.1@23.023,23.417
XTALO: C2.2 R40.1 U1.2 Y1.2 | length 19.2
  Top Layer w0.178: Y1.2@23.014,6.858 21.552,8.32 C2.2@21.552,10.414 21.552,12.268 R40.1@21.374,12.446 20.828,12.992 20.828,13.843 20.066,14.605 20.066,18.923 23.423,22.28 U1.2@23.423,23.417
pads on no net: P5.7 P5.9 U3.40 U6.1 U6.3 U6.4 U6.7 U6.8 U6.16 U6.17 U6.19 U6.21 U6.24 U6.25 U6.26 Y2.Shell

## Polygon pours and split planes (outlines as drawn)
GND on Bottom Layer "GND_L02_P024" (solid, remove dead copper, pour order 24): 0,70 100,70 100,0 0,0
GND on Top Layer "GND_L01_P026" (solid, remove dead copper, pour order 26): 0,70 100,70 100,0 0,0

## Keep-outs
Keep-Out Layer:
  lines w0.254: 0,69.85 0,0 100,0 100,70 0,70

## Other copper
Top Layer:
  region net 3V3: 23.74,27.305 23.656,27.305 23.368,27.017 24.13,27.017 24.13,27.051 23.749,27.432
  region net 3V3: 23.74,30.589 23.368,30.217 23.74,29.845
  pour cut-out: 11.303,12.827 11.303,4.572 14.351,4.572 14.351,12.827
  pour cut-out: 73.533,53.721 84.709,53.721 84.709,57.912 73.533,57.912
  pour cut-out: 14.986,4.699 26.162,4.699 26.162,9.144 14.986,9.144
Bottom Layer:
  pour cut-out: 11.303,12.827 11.303,4.572 14.351,4.572 14.351,12.827
  pour cut-out: 73.533,53.721 84.709,53.721 84.709,57.912 73.533,57.912
  pour cut-out: 14.986,4.699 26.162,4.699 26.162,9.144 14.986,9.144

## Silkscreen, mask and mechanical layers (free items; w line width, h text height)
Top Overlay:
  text "122" at 14.986,67.691 h0.76 r90
  text "120" at 17.526,67.691 h0.76 r90
  text "118" at 20.066,67.691 h0.76 r90
  text "116" at 22.606,67.691 h0.76 r90
  text "114" at 25.146,67.691 h0.76 r90
  text "112" at 27.686,67.691 h0.76 r90
  text "110" at 30.226,67.691 h0.76 r90
  text "107" at 59.436,67.691 h0.76 r90
  text "105" at 61.976,67.691 h0.76 r90
  text "103" at 64.516,67.691 h0.76 r90
  text "G" at 67.056,67.691 h0.76 r90
  text "89" at 69.596,67.691 h0.76 r90
  text "87" at 72.136,67.691 h0.76 r90
  text "85" at 74.676,67.691 h0.76 r90
  text "G" at 77.216,67.691 h0.76 r90
  text "79" at 79.756,67.691 h0.76 r90
  text "77" at 82.296,67.691 h0.76 r90
  text "75" at 84.836,67.691 h0.76 r90
  text "73" at 87.376,67.691 h0.76 r90
  text "71" at 89.916,67.691 h0.76 r90
  text "G" at 92.456,67.691 h0.76 r90
  text "G" at 37.211,67.31 h0.76 r90
  text "G" at 39.751,67.31 h0.76 r90
  text "G" at 42.291,67.31 h0.76 r90
  text "G" at 44.831,67.31 h0.76 r90
  text "G" at 47.371,67.31 h0.76 r90
  text "NC" at 49.911,67.31 h0.76 r90
  text "3V3" at 52.451,67.183 h0.76 r90
  text "G" at 27.686,61.341 h0.76 r90
  text "G" at 67.056,61.214 h0.76 r90
  text "G" at 79.756,61.214 h0.76 r90
  text "G" at 1.778,60.579 h0.76
  text "123" at 8.133,60.579 h0.76
  text "DI" at 39.751,60.579 h0.76 r90
  text "DO" at 42.291,60.579 h0.76 r90
  text "MS" at 44.831,60.579 h0.76 r90
  text "CK" at 47.498,60.579 h0.76 r90
  text "RST" at 49.911,60.579 h0.76 r90
  text "NC" at 52.451,60.579 h0.76 r90
  text "93" at 69.596,60.452 h0.76 r90
  text "88" at 72.136,60.452 h0.76 r90
  text "86" at 74.676,60.452 h0.76 r90
  text "82" at 77.216,60.452 h0.76 r90
  text "78" at 82.296,60.452 h0.76 r90
  text "76" at 84.836,60.452 h0.76 r90
  text "74" at 87.376,60.452 h0.76 r90
  text "72" at 89.916,60.452 h0.76 r90
  text "70" at 92.456,60.452 h0.76 r90
  text "E_R" at 37.084,60.27 h0.76 r90
  text "121" at 14.859,60.198 h0.76 r90
  text "119" at 17.653,60.071 h0.76 r90
  text "117" at 19.939,60.071 h0.76 r90
  text "115" at 22.606,60.071 h0.76 r90
  text "113" at 25.146,60.071 h0.76 r90
  text "109" at 30.226,59.944 h0.76 r90
  text "108" at 59.436,59.817 h0.76 r90
  text "106" at 61.849,59.817 h0.76 r90
  text "104" at 64.516,59.817 h0.76 r90
  text "LS1C0300B_176A_Msystem V1.1" at 37.592,58.166 h1.2
  text "LS1C0300B_176A_Msystem V1.1" at 37.592,58.166 h1.2
  text "LS1C0300B_176A_Msystem V1.1" at 37.592,58.166 h1.2
  text "LS1C0300B_176A_Msystem V1.1" at 37.592,58.166 h1.2
  text "LS1C0300B_176A_Msystem V1.1" at 37.592,58.166 h1.2
  text "LS1C0300B_176A_Msystem V1.1" at 37.592,58.166 h1.2
  text "LS1C0300B_176A_Msystem V1.1" at 37.592,58.166 h1.2
  text "G" at 1.778,58.039 h0.76
  text "G" at 8.133,58.039 h0.76
  text "128" at 0.513,55.499 h0.76
  text "127" at 8.133,55.499 h0.76
  text "130" at 0.508,52.959 h0.76
  text "129" at 8.133,52.959 h0.76
  text "132" at 0.513,50.419 h0.76
  text "G" at 8.133,50.419 h0.76
  text "134" at 0.513,47.879 h0.76
  text "133" at 8.133,47.879 h0.76
  text "135" at 8.133,45.339 h0.76
  text "136" at 0.508,45.212 h0.76
  text "138" at 0.508,42.291 h0.76
  text "137" at 8.128,42.291 h0.76
  text "140" at 0.508,39.751 h0.76
  text "139" at 8.128,39.751 h0.76
  text "141" at 8.128,37.211 h0.76
  text "G" at 1.778,37.084 h0.76
  text "143" at 8.128,34.671 h0.76
  text "144" at 0.508,34.544 h0.76
  text "145" at 8.128,32.131 h0.76
  text "146" at 0.508,32.004 h0.76
  text "只为奉献！" at 54.356,32.004 h3.05
  text "147" at 8.128,29.591 h0.76
  text "148" at 0.508,29.464 h0.76
  text "望：桃李满天下！" at 49.911,28.829 h3.05
  text "RX" at 8.128,27.051 h0.76
  text "TX" at 0.508,26.924 h0.76
  text "151" at 8.128,24.511 h0.76
  text "G" at 1.778,24.384 h0.76
  text "G" at 1.778,21.971 h0.76
  text "157" at 8.128,21.971 h0.76
  text "158" at 0.508,19.431 h0.76
  text "G" at 8.128,19.431 h0.76
  text "161" at 8.128,17.018 h0.76
  text "160" at 0.508,16.891 h0.76
  text "168" at 0.508,14.351 h0.76
  text "G" at 8.128,14.351 h0.76
  text "By_lgh" at 36.322,12.827 h1.2
  text "By_lgh" at 36.322,12.827 h1.2
  text "By_lgh" at 36.322,12.827 h1.2
  text "By_lgh" at 36.322,12.827 h1.2
  text "20180306" at 47.244,12.7 h1.2
  text "20180306" at 47.244,12.7 h1.2
  text "20180306" at 47.244,12.7 h1.2
  text "20180306" at 47.244,12.7 h1.2
  text "+5V" at 80.264,12.446 h1.2
  text "GND" at 87.503,12.319 h1.2
  text "RV" at 1.016,11.811 h0.76
  text "169" at 8.128,11.43 h0.76
  text "祝大家开心每一天！" at 34.417,9.652 h3.05
  text "5V" at 8.128,9.271 h0.76
  text "G" at 1.778,9.017 h0.76
  text "G" at 29.591,8.255 h0.76 r90
  text "4" at 32.131,8.255 h0.76 r90
  text "6" at 34.671,8.255 h0.76 r90
  text "8" at 37.211,8.255 h0.76 r90
  text "10" at 39.751,8.255 h0.76 r90
  text "12" at 42.291,8.255 h0.76 r90
  text "14" at 44.831,8.255 h0.76 r90
  text "16" at 47.371,8.255 h0.76 r90
  text "G" at 49.911,8.255 h0.76 r90
  text "20" at 52.451,8.255 h0.76 r90
  text "G" at 54.991,8.255 h0.76 r90
  text "24" at 57.531,8.255 h0.76 r90
  text "G" at 60.071,8.255 h0.76 r90
  text "G" at 62.611,8.255 h0.76 r90
  text "3" at 32.131,1.778 h0.76 r90
  text "5" at 34.671,1.778 h0.76 r90
  text "7" at 37.211,1.778 h0.76 r90
  text "9" at 39.751,1.778 h0.76 r90
  text "G" at 42.291,1.778 h0.76 r90
  text "5V" at 29.591,1.143 h0.76 r90
  text "13" at 44.831,1.143 h0.76 r90
  text "15" at 47.371,1.143 h0.76 r90
  text "17" at 49.911,1.143 h0.76 r90
  text "19" at 52.451,1.143 h0.76 r90
  text "21" at 54.991,1.143 h0.76 r90
  text "23" at 57.531,1.143 h0.76 r90
  text "25" at 60.071,1.143 h0.76 r90
  text "白菜板 V1.2" at 8.636,1.016 h3.05
  text "3V3" at 62.611,0.381 h0.76 r90
Bottom Overlay:
  text "QQ: 948935145" at 72.136,30.734 h3.05
  text "店铺：桃李科技自营店" at 75.438,27.686 h3.05
  text "店铺地址：https://shop113164026.taobao.com" at 81.534,24.892 h3.05
  text "QQ交流群：633262684" at 81.407,22.098 h3.05

## Text inside footprints (layer, text, board x,y; h text height)
P4: Top Overlay "1" at 94.615,66.548 h1.27 r180
P7: Top Overlay "ON" at 66.04,36.703 h0.85 r90